# Altium PCB 555project.PcbDoc
Units mm, origin at the board's own origin, x right, y up, seen from the top; angles counter-clockwise.
Board outline 34.67 x 25.53 mm, 2 copper layers (Top Layer, Bottom Layer); 8 components, 7 nets, 22 pads, 0 vias.
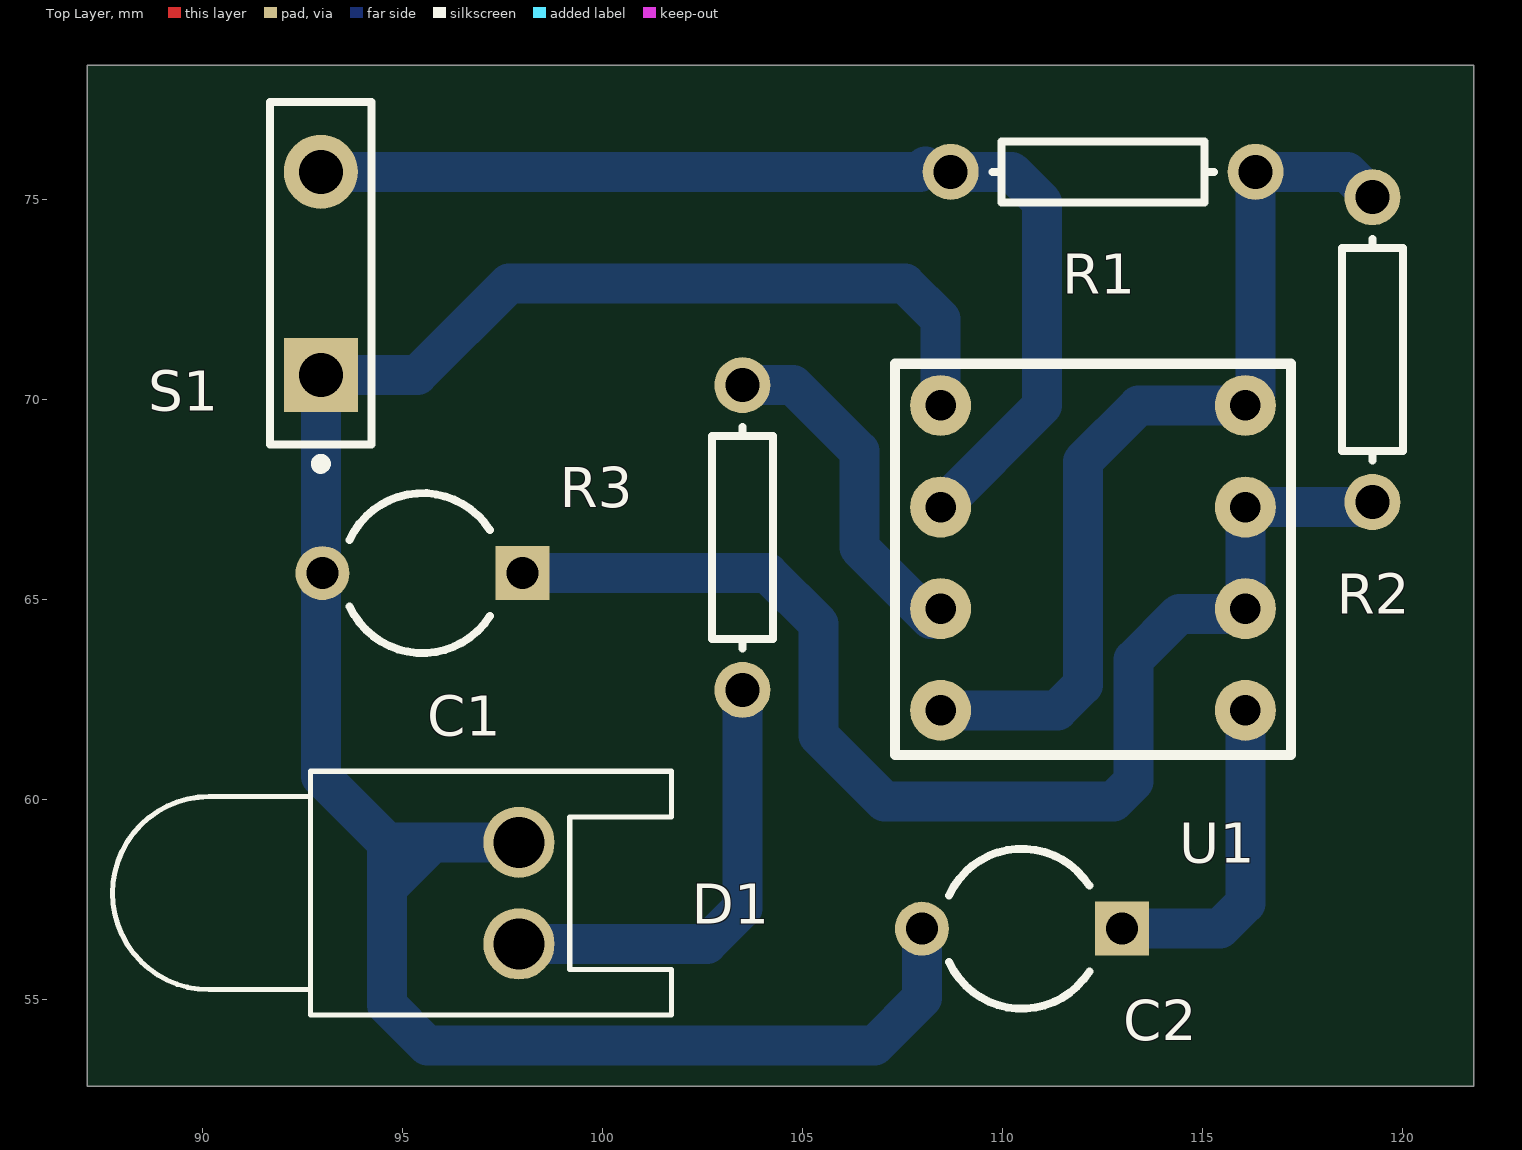
[diagram p0: Top Layer view]
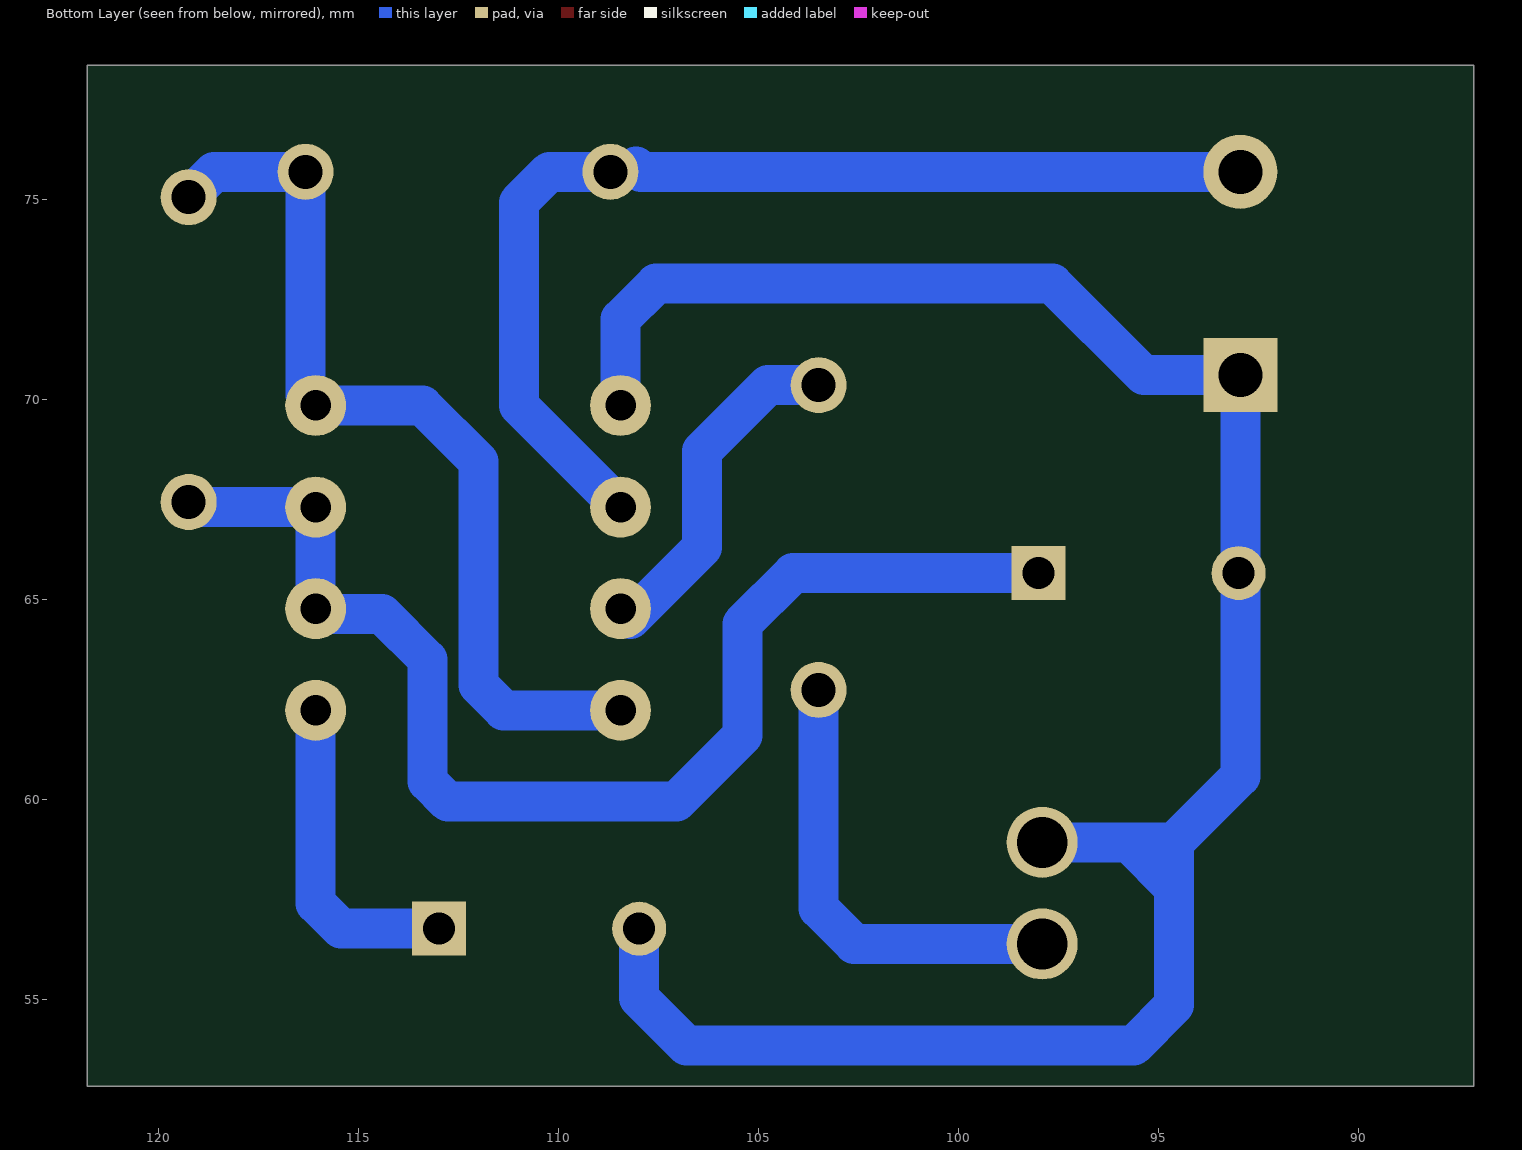
[diagram p1: Bottom Layer view, seen from below]

## Layer stack, top to bottom
Top Solder: solder mask 0.0102, Solder Resist, Dk 3.5
Top Layer: signal copper 0.0356
Dielectric 1: dielectric 0.32, FR-4, Dk 4.8
Bottom Layer: signal copper 0.0356
Bottom Solder: solder mask 0.0102, Solder Resist, Dk 3.5

## Board outline
87.122,78.359 87.122,52.832 121.793,52.832 121.793,78.359

## Design rules (kind name [scope] priority, off if disabled: settings)
Clearance [All] p1: gap=0.127 ignorepadtopadclearanceinfootprint=FALSE
PolygonConnect [All] p1: connectstyle=Relief reliefconductorwidth=0.254 reliefentries=4 polygonreliefangle="90 Angle" airgapwidth=0.254
RoutingVias [All] p1: holewidth=0.711 width=1.27 viastyle="Through Hole" minholewidth=0.711 minwidth=1.27 maxholewidth=0.711 maxwidth=1.27
SolderMaskExpansion [All] p1: expansion=0.102
Width [All] p1: maxlimit=2 minlimit=0.5 preferedwidth=1
30 further rules are at their usual default settings.

## Components (designator, comment, footprint, x,y, rotation, side; value= is the part's Value field where it differs from the comment)
C1 "Cap2" CAPR5-4X5 95.504,65.659 r180 top value=100pF
C2 "Cap2" CAPR5-4X5 110.49,56.769 r180 top value=100pF
D1 "LED0" LED-0 97.917,57.658 r270 top
R1 "Res1" AXIAL-0.3 112.522,75.692 r0 top value=1K
R2 "Res1" AXIAL-0.3 119.253,71.247 r90 top value=1K
R3 "Res1" AXIAL-0.3 103.505,66.548 r90 top value=1K
S1 "SW-PB" SPST-2 92.964,73.152 r90 top
U1 "LM555" LM555 108.458,70.64 r0 top

## Footprints (in the part's own frame and the unit in brackets; to place one, negate y for a bottom-side part, rotate by r counter-clockwise, add the part's x,y. Pads: shape width x height; smd on the part's side, far side on the other; paste and mask are expansions set on the pad)
AXIAL-0.3 [mm] "Axial Device, Thru-Hole; 2 Leads; 0.3 in Pin Spacing"
  round 1.4 hole 0.85: 1(-3.81,0) 2(3.81,0)
  silkscreen extent -2.77,-0.76 2.77,0.76
CAPR5-4X5 [mm] "Capacitor; 2 Leads"
  rect 1.35x1.35 hole 0.8: 1(-2.5,0)
  round 1.35 hole 0.8: 2(2.5,0)
  silkscreen extent -1.69,-2 1.82,2
LED-0 [mil] "LED; 2 Leads"
  round 70 hole 50: 1(50,0) 2(-50,0)
  silkscreen extent -120,-400 120,150
LM555 [mil] "LM555"
  round 60 hole 30: 1(0,-31.1) 2(0,-131.1) 3(0,-231.1) 4(0,-331.1) 5(300,-331.1) 6(300,-231.1) 7(300,-131.1) 8(300,-31.1)
  silkscreen extent -45,-375 345,10
SPST-2 [mm] "Switch; 2 Leads"
  rect 1.85x1.85 hole 1.1: 1(-2.54,0)
  round 1.85 hole 1.1: 2(2.54,0)
  silkscreen extent -4.89,-1.27 4.28,1.27

## Part data
C1 C2: "Capacitor", PackageDescription="Capacitor; 2 Leads", PackageReference=CAPR5-4X5, Published=23-Sep-2002, Publisher="Altium Limited"
D1: "Typical INFRARED GaAs LED", LatestRevisionDate=08-Jul-2005, LatestRevisionNote="Mech Layer 1 removed.", PackageDescription="LED; 2 Leads", PackageReference=LED-0, Published=8-Jun-2000, Publisher="Altium Limited"
R1 R2 R3: "Resistor", LatestRevisionDate=17-Jul-2002, LatestRevisionNote="Re-released for DXP Platform.", PackageDescription="Axial Device, Thru-Hole; 2 Leads; 0.3 in Pin Spacing", PackageReference=AXIAL-0.3, Published=8-Jun-2000, Publisher="Altium Limited"
S1: "Switch", LatestRevisionDate=17-Jul-2002, LatestRevisionNote="Re-released for DXP Platform.", PackageDescription="Switch; 2 Leads", PackageReference=SPST-2, Published=24-Mar-1999, Publisher="Altium Limited"

## Nets (pads, with @x,y where several pads share a name; then routed paths per layer and width w, separated by ;. In a path a pad name is that pad's centre, name@x,y a point inside that pad or via, vN(x,y) a via of type N, cw(c..) or ccw(c..) an arc to the next point about the centre after c; other vN are vias at no path point)
GND: C1.2 C2.2 D1.2 S1.1 U1.1 | length 56.3
  Bottom Layer w1: D1.2 95.758,58.928 ; C2.2 107.99,55.031 106.807,53.848 95.631,53.848 94.615,54.864 94.615,57.785 ; U1.1 108.458,72.009 107.569,72.898 97.663,72.898 95.377,70.612 S1.1 92.964,60.579 94.615,58.928 ; 94.615,57.785 94.615,58.928 ; 94.615,57.785 95.758,58.928 ; 94.615,58.928 95.758,58.928
NetC2_1: C2.1 U1.5 | length 8.2
  Bottom Layer w1: C2.1 115.443,56.769 116.078,57.404 U1.5
NetD1_1: D1.1 R3.1 | length 11.4
  Bottom Layer w1: D1.1 102.616,56.388 103.505,57.277 R3.1
NetR1_1: R1.1 S1.2 U1.2 | length 26.4
  Bottom Layer w1: S1.2 107.95,75.692 R1.1@108.077,75.819 ; U1.2 110.998,69.85 110.998,74.93 110.236,75.692 R1.1
o/p: R3.2 U1.3 | length 8.5
  Bottom Layer w1: R3.2 104.775,70.358 106.426,68.707 106.426,66.294 U1.3@108.204,64.516
pin: C1.1 R2.1 U1.6 U1.7 | length 31.6
  Bottom Layer w1: C1.1 104.14,65.659 105.41,64.389 105.41,61.595 107.061,59.944 112.776,59.944 113.284,60.452 113.284,63.5 114.427,64.643 115.951,64.643 U1.6 U1.7 119.126,67.31 R2.1
VCC: R1.2 R2.2 U1.4 U1.8 | length 23.2
  Bottom Layer w1: U1.4 111.379,62.23 112.014,62.865 112.014,68.453 113.411,69.85 U1.8 116.332,70.104 R1.2 118.618,75.692 R2.2

## Silkscreen, mask and mechanical layers (free items; w line width, h text height)
Mechanical 1:
  lines w0.254: 87.376,53.086 87.376,78.105 121.539,78.105 121.539,53.086 87.376,53.086